# Altium PCB 3_inch_V1.PcbDoc (part 2 of 2)
Units mm, origin at the board's own origin, x right, y up, seen from the top; angles counter-clockwise.
Board outline 36.7 x 32 mm, 4 copper layers (Top Copper, Signal Layer 1, Signal Layer 2, Bottom Copper), stack 1.17 mm thick; 15 components, 44 nets, 117 pads, 124 vias.
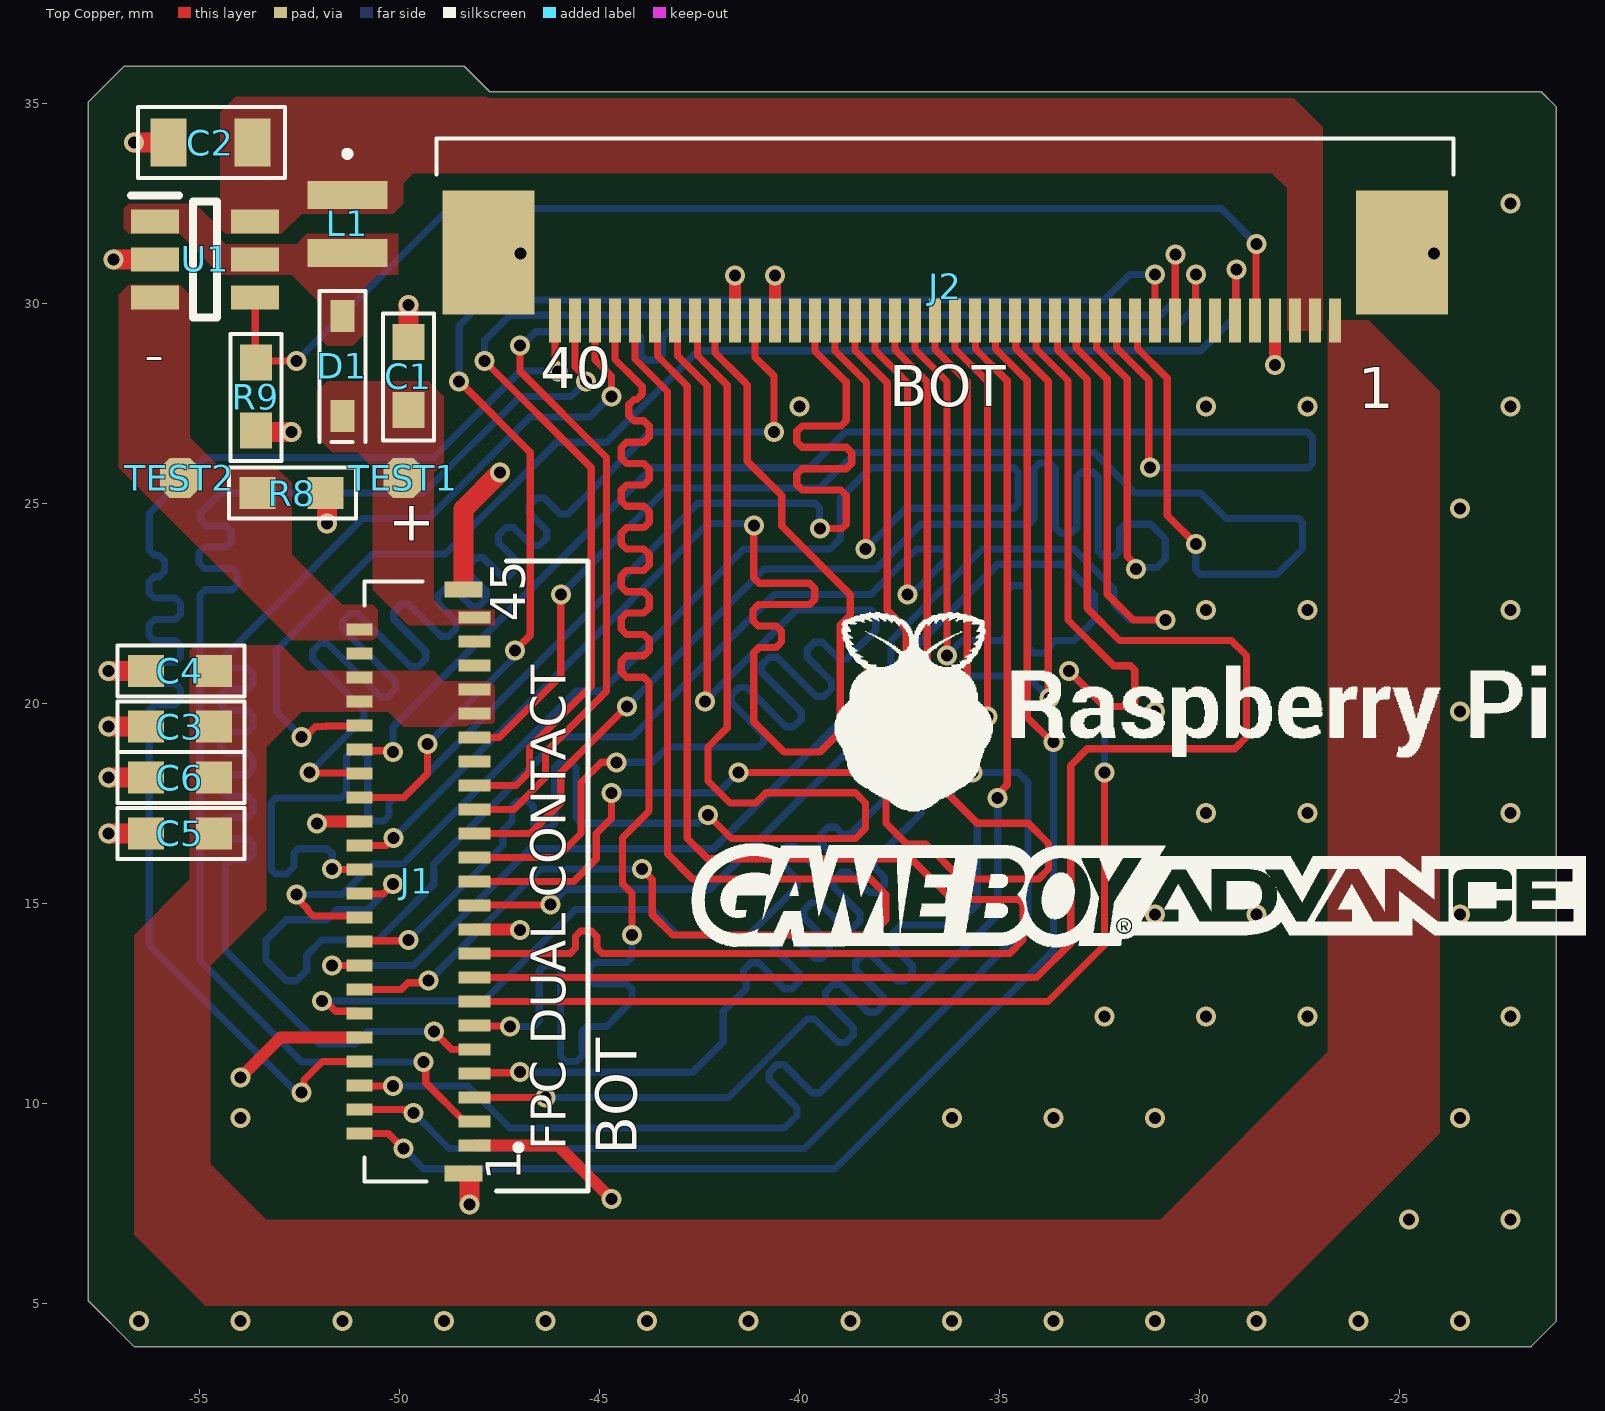
[diagram p0: Top Copper view]

## Silkscreen, mask and mechanical layers (free items; w line width, h text height) (continued)
Dimensions: (continued)
  lines w0.127: -57.785,5.08 -56.642,3.937 -46.482,3.937 -21.717,3.937 -21.082,4.572 -21.082,34.925 -21.463,35.306 -22.733,35.306 -47.752,35.306 -48.387,35.941 -56.896,35.941 -57.785,35.052 -57.785,5.08

## Text inside footprints (layer, text, board x,y; h text height)
J1: Top Overlay "FPC DUAL CONTACT" at -45.562,8.846 h1.5 r90; Top Overlay "1" at -46.689,8.084 h1.5 r90; Top Overlay "45" at -46.578,22.054 h1.5 r90